# EAGLE board bias_v0 (EAGLE 9.6.2)
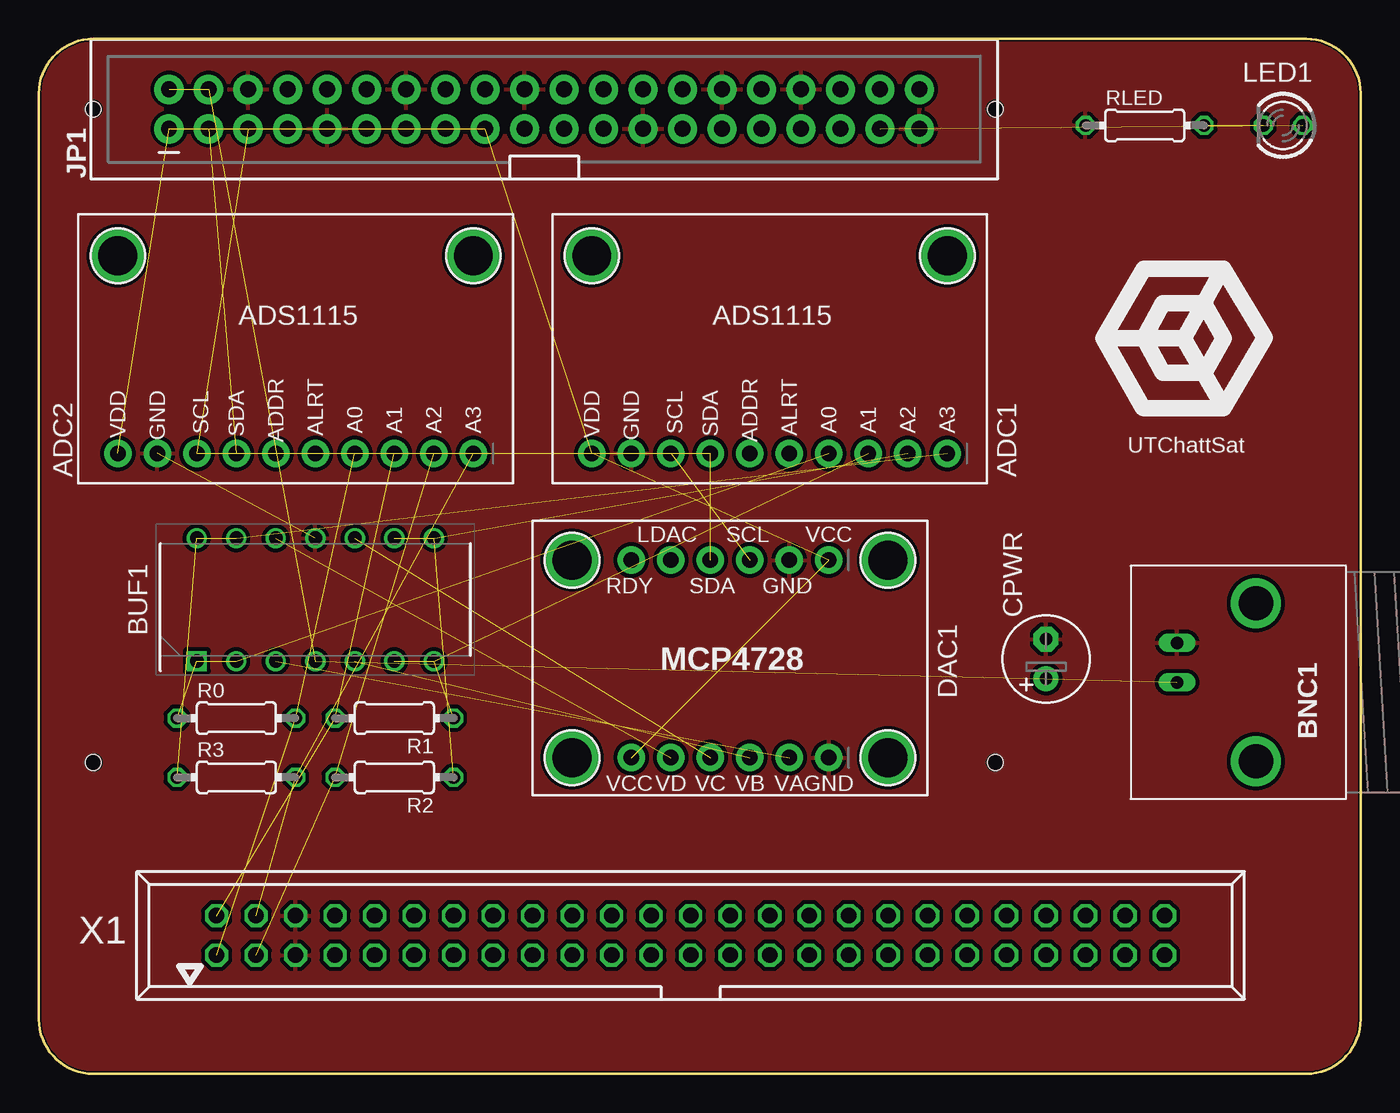
[diagram p0: board, top side]
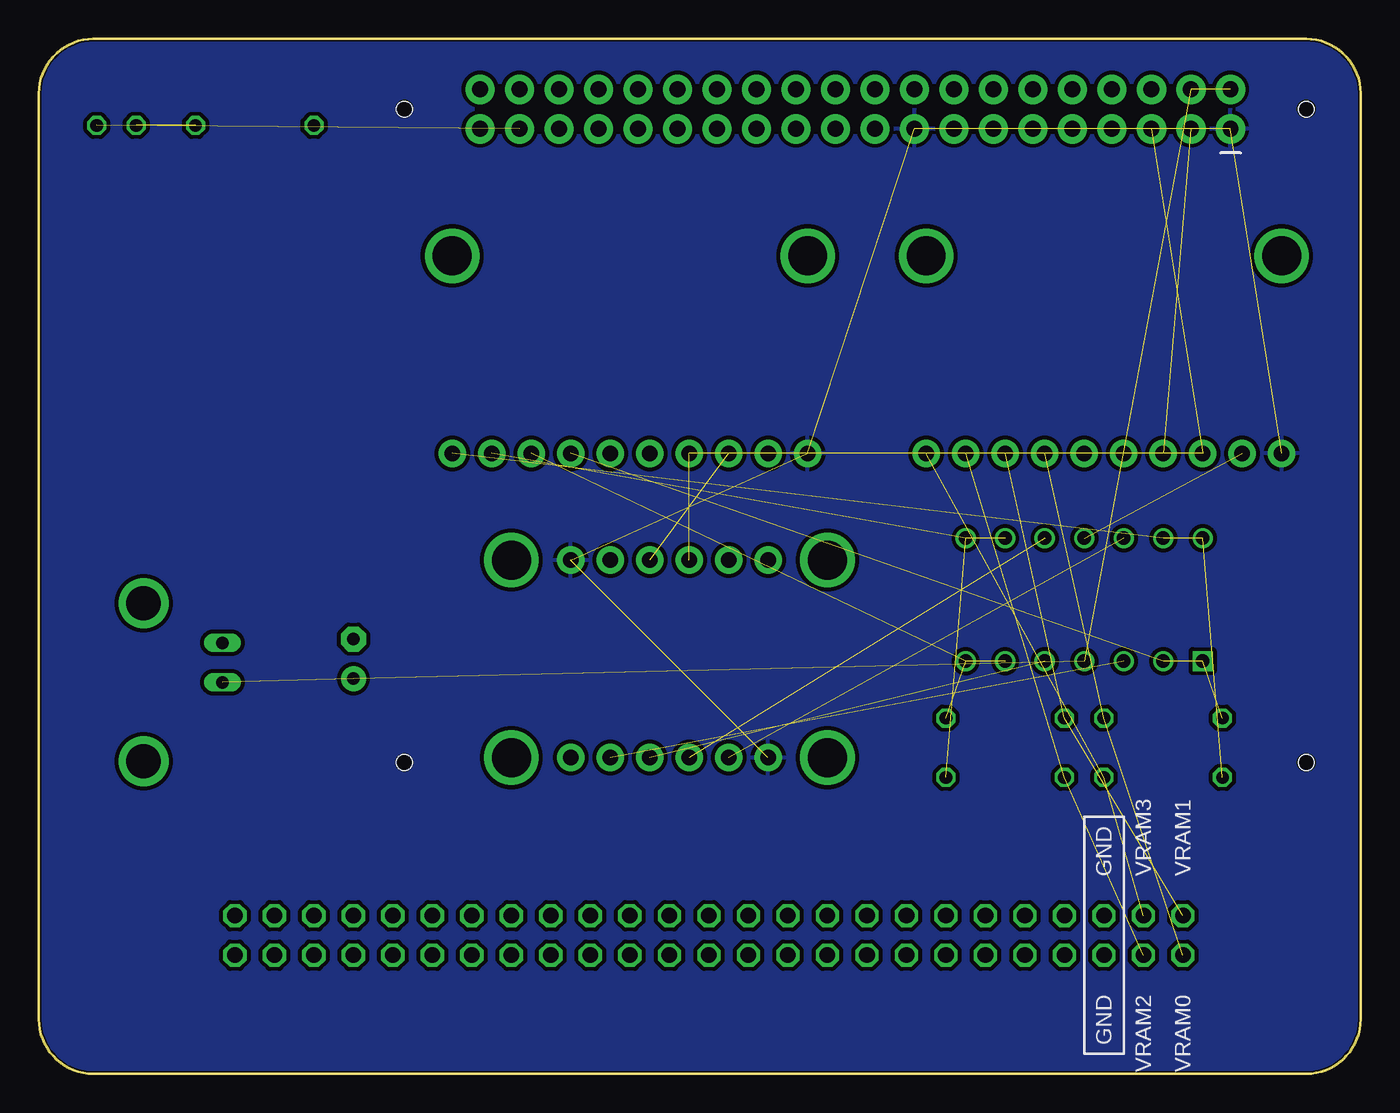
[diagram p1: board, bottom side, seen from below]

Size 85 x 66.53 mm. Coordinates in mm from the lower left corner, seen from the top.
Outline: 3.5,0 81.5,0 arc90 85,3.5 85,63.03 arc90 81.5,66.53 3.5,66.53 arc90 0,63.03 0,3.5 arc90 3.5,0
Copper layers (1*16): Top 0.035mm / dielectric 0.2mm / Bottom 0.035mm
Design rules "jlcpcb-2-layer *": minimum track width 10mil, minimum drill 0.2mm, track to track 10mil, track to pad 10mil, pad to pad 5mil, via to via 5mil, smd to smd 0mil, copper to edge 0.1mm, drill to drill 5mil, minimum pad ring 4mil, minimum via ring 4mil, stop-mask expansion 3mil, vias tented up to drill 100mil, thermal gap 10mil
Net classes: 2 lowpower: width 0.305 mm, drill 0.483 mm
Holes 1 mm at 3.5,62.01 61.5,62.01 61.5,20.01 3.5,20.01

## Footprints (pad centres in the part's own frame; a part is rotated, then mirrored left to right if it is on the bottom)
BNC = drill 2.2: 3 -5.08,5.08; 4 5.08,5.08 | drill 0.8 long: GND -2.54,0; S 0,0
CDIP790W66P254L1954H508Q14 = drill 0.86 pad 1.26 square: 1 -3.95,7.62 | drill 0.86 pad 1.26: 2 -3.95,5.08; 3 -3.95,2.54; 4 -3.95,0; 5 -3.95,-2.54; 6 -3.95,-5.08; 7 -3.95,-7.62; 8 3.95,-7.62; 9 3.95,-5.08; 10 3.95,-2.54; 11 3.95,0; 12 3.95,2.54; 13 3.95,5.08; 14 3.95,7.62
E2,5-6 = drill 0.813 pad 1.6: + -1.27,0 | drill 0.813 pad 1.6 octagon: - 1.27,0
2X20_SHROUDED = drill 1.016 pad 1.88: 1 -1.27,24.13; 2 1.27,24.13; 3 -1.27,21.59; 4 1.27,21.59; 5 -1.27,19.05; 6 1.27,19.05; 7 -1.27,16.51; 8 1.27,16.51; 9 -1.27,13.97; 10 1.27,13.97; 11 -1.27,11.43; 12 1.27,11.43; 13 -1.27,8.89; 14 1.27,8.89; 15 -1.27,6.35; 16 1.27,6.35; 17 -1.27,3.81; 18 1.27,3.81; 19 -1.27,1.27; 20 1.27,1.27; 21 -1.27,-1.27; 22 1.27,-1.27; 23 -1.27,-3.81; 24 1.27,-3.81; 25 -1.27,-6.35; 26 1.27,-6.35; 27 -1.27,-8.89; 28 1.27,-8.89; 29 -1.27,-11.43; 30 1.27,-11.43; 31 -1.27,-13.97; 32 1.27,-13.97; 33 -1.27,-16.51; 34 1.27,-16.51; 35 -1.27,-19.05; 36 1.27,-19.05; 37 -1.27,-21.59; 38 1.27,-21.59; 39 -1.27,-24.13; 40 1.27,-24.13
1X10_ROUND70 = drill 1 pad 1.778: 1 -11.43,0; 2 -8.89,0; 3 -6.35,0; 4 -3.81,0; 5 -1.27,0; 6 1.27,0; 7 3.81,0; 8 6.35,0; 9 8.89,0; 10 11.43,0
1X06_ROUND_70 = drill 1 pad 1.778: 1 -6.35,0; 2 -3.81,0; 3 -1.27,0; 4 1.27,0; 5 3.81,0; 6 6.35,0
LED3MM = drill 0.813 octagon: A -1.27,0; K 1.27,0
0204/7 = drill 0.813 octagon: 1 -3.81,0; 2 3.81,0
MOUNTINGHOLE_2.5_PLATED = drill 2.5 pad 3.2: P$1 0,0
057-050-1 = drill 1 octagon: 1 -30.48,-1.27; 2 -30.48,1.27; 3 -27.94,-1.27; 4 -27.94,1.27; 5 -25.4,-1.27; 6 -25.4,1.27; 7 -22.86,-1.27; 8 -22.86,1.27; 9 -20.32,-1.27; 10 -20.32,1.27; 11 -17.78,-1.27; 12 -17.78,1.27; 13 -15.24,-1.27; 14 -15.24,1.27; 15 -12.7,-1.27; 16 -12.7,1.27; 17 -10.16,-1.27; 18 -10.16,1.27; 19 -7.62,-1.27; 20 -7.62,1.27; 21 -5.08,-1.27; 22 -5.08,1.27; 23 -2.54,-1.27; 24 -2.54,1.27; 25 0,-1.27; 26 0,1.27; 27 2.54,-1.27; 28 2.54,1.27; 29 5.08,-1.27; 30 5.08,1.27; 31 7.62,-1.27; 32 7.62,1.27; 33 10.16,-1.27; 34 10.16,1.27; 35 12.7,-1.27; 36 12.7,1.27; 37 15.24,-1.27; 38 15.24,1.27; 39 17.78,-1.27; 40 17.78,1.27; 41 20.32,-1.27; 42 20.32,1.27; 43 22.86,-1.27; 44 22.86,1.27; 45 25.4,-1.27; 46 25.4,1.27; 47 27.94,-1.27; 48 27.94,1.27; 49 30.48,-1.27; 50 30.48,1.27

## Placement (x,y rotation side)
BNC1  BNC  [BNC]  73.19,25.16 270 top
BUF1  LM124_PTH  [CDIP790W66P254L1954H508Q14]  17.78,30.48 90 top
CPWR  [E2,5-6]  64.77,26.67 90 top
JP1  RASPBERRYPI-40-PIN-GPIO_PTH  [2X20_SHROUDED]  32.5,62.01 90 top
JP2  [1X10_ROUND70]  46.99,39.88 180 top
JP3  [1X06_ROUND_70]  44.45,33.02 180 top
JP4  [1X06_ROUND_70]  44.45,20.32 180 top
JP5  [1X10_ROUND70]  16.51,39.88 180 top
LED1  [LED3MM]  80.01,60.96 180 top
R0  [0204/7]  12.7,22.86 0 top
R1  [0204/7]  22.86,22.86 180 top
R2  [0204/7]  22.86,19.05 180 top
R3  [0204/7]  12.7,19.05 0 top
RLED  [0204/7]  71.12,60.96 0 top
U$3  MOUNTINGHOLE2.5  [MOUNTINGHOLE_2.5_PLATED]  58.42,52.58 180 top
U$4  MOUNTINGHOLE2.5  [MOUNTINGHOLE_2.5_PLATED]  54.61,20.32 180 top
U$5  MOUNTINGHOLE2.5  [MOUNTINGHOLE_2.5_PLATED]  34.29,20.32 180 top
U$6  MOUNTINGHOLE2.5  [MOUNTINGHOLE_2.5_PLATED]  54.61,33.02 180 top
U$7  MOUNTINGHOLE2.5  [MOUNTINGHOLE_2.5_PLATED]  34.29,33.02 180 top
U$8  MOUNTINGHOLE2.5  [MOUNTINGHOLE_2.5_PLATED]  35.56,52.58 180 top
U$15  MOUNTINGHOLE2.5  [MOUNTINGHOLE_2.5_PLATED]  27.94,52.58 180 top
U$16  MOUNTINGHOLE2.5  [MOUNTINGHOLE_2.5_PLATED]  5.08,52.58 180 top
X1  PARALLEL COMMS  [057-050-1]  41.91,8.89 0 top

## Library data of the parts
BNC1 = SparkFun-Connectors; PROD_ID: LPA-12729; SF_ID: PRT-10550
BUF1 = SamacSys_Parts; ARROW_PART_NUMBER: LM124J/PB; ARROW_PRICE-STOCK: https://www.arrow.com/en/products/lm124jpb/texas-instruments; DESCRIPTION: Low Power Quad Operational Amplifier; HEIGHT: 5.08mm; MANUFACTURER_NAME: Texas Instruments; MANUFACTURER_PART_NUMBER: LM124J/PB; MOUSER_PART_NUMBER: 926-LM124J; MOUSER_PRICE-STOCK: https://www.mouser.co.uk/ProductDetail/Texas-Instruments/LM124J-PB?qs=iiglMaU8SAcLiddS7jKHDA%3D%3D
CPWR = rcl; SPICEPREFIX: C
JP1 = SparkFun-Connectors; PROD_ID: CONN-12263; SF_ID: PRT-13054
JP2-JP5 U$3-U$8 U$15 U$16 = microbuilder
LED1 = led
R0 R1-R3 RLED = rcl; SPICEPREFIX: R
X1 = con-panduit; OC_FARNELL: unknown; OC_NEWARK: unknown

## Nets
3V3: JP1.1 JP1.17 JP2.10 JP3.1 JP4.6 JP5.10
+5V: BNC1.S BUF1.4 CPWR.+ JP1.2 JP1.4
GND: BNC1.GND BUF1.11 CPWR.- JP1.6 JP1.9 JP1.14 JP1.20 JP1.25 JP1.30 JP1.34 JP1.39 JP2.9 JP3.2 JP4.1 JP5.9 RLED.1 X1.5 X1.6
N$1: JP1.37 LED1.A
N$2: LED1.K RLED.2
N$4: X1.7
N$5: X1.9
N$6: X1.11
N$7: X1.13
N$8: X1.15
N$9: X1.17
N$10: X1.19
N$11: X1.21
N$12: X1.23
N$13: X1.25
N$14: X1.27
N$15: X1.29
N$16: X1.31
N$17: X1.33
N$18: X1.35
N$19: X1.37
N$20: X1.39
N$21: X1.41
N$22: X1.43
N$23: X1.45
N$24: X1.47
N$25: X1.49
N$26: X1.42
N$27: X1.44
N$28: X1.46
N$29: X1.48
N$30: X1.50
N$31: X1.32
N$32: X1.34
N$33: X1.36
N$34: X1.38
N$35: X1.40
N$36: X1.22
N$37: X1.24
N$38: X1.26
N$39: X1.28
N$40: X1.30
N$41: X1.12
N$42: X1.14
N$43: X1.16
N$44: X1.18
N$45: X1.20
N$49: X1.8
N$50: X1.10
SCL: JP1.5 JP2.8 JP3.3 JP5.8
SDA: JP1.3 JP2.7 JP3.4 JP5.7
VBUF0: BUF1.1 BUF1.2 JP2.4 R0.1
VBUF1: BUF1.6 BUF1.7 JP2.3 R1.1
VBUF2: BUF1.8 BUF1.9 JP2.2 R2.1
VBUF3: BUF1.13 BUF1.14 JP2.1 R3.1
VDAC0: BUF1.3 JP4.2
VDAC1: BUF1.5 JP4.3
VDAC2: BUF1.10 JP4.4
VDAC3: BUF1.12 JP4.5
VOUT0: JP5.4 R0.2 X1.1
VOUT1: JP5.3 R1.2 X1.2
VOUT2: JP5.2 R2.2 X1.3
VOUT3: JP5.1 R3.2 X1.4

## Tracks (layer width: path | path; a pad name or v marks a point on that pad's centre or on a via)
3V3  (5 unrouted)
  pour Bottom: -0.25,67.06 -0.25,-0.25 85.34,-0.25 85.34,67.06
+5V  (4 unrouted)
GND  (1 unrouted)
  pour Top: -0.25,67.06 85.34,67.06 85.34,66.8 85.34,-0.25 -0.25,-0.25
N$1  (1 unrouted)
N$2  (1 unrouted)
SCL  (3 unrouted)
SDA  (3 unrouted)
VBUF0  (3 unrouted)
VBUF1  (3 unrouted)
VBUF2  (3 unrouted)
VBUF3  (3 unrouted)
VDAC0  (1 unrouted)
VDAC1  (1 unrouted)
VDAC2  (1 unrouted)
VDAC3  (1 unrouted)
VOUT0  (2 unrouted)
VOUT1  (2 unrouted)
VOUT2  (2 unrouted)
VOUT3  (2 unrouted)

## Text on the board
tPlace: ADS1115 | ADS1115 | ADDR | ALRT | ADDR | ALRT | VDD | GND | SCL | SDA | VDD | GND | SCL | SDA | A0 | A1 | A2 | A3 | A0 | A1 | A2 | A3 | ADC2 | ADC1 | LDAC | SCL | VCC | RDY | SDA | GND | MCP4728 | DAC1 | VCC | VD | VC | VB | VA | GND
bPlace: VRAM1 | VRAM3 | GND | VRAM0 | VRAM2 | GND
tNames: UTChattSat